# Altium PCB PCB1.PcbDoc
Units mil, origin at the board's own origin, x right, y up, seen from the top; angles counter-clockwise.
Board outline 5885 x 3800 mil, 2 copper layers (Top Layer, Bottom Layer); 49 components, 25 nets, 163 pads, 0 vias.
Unrouted connection lines stored in the file: 74.
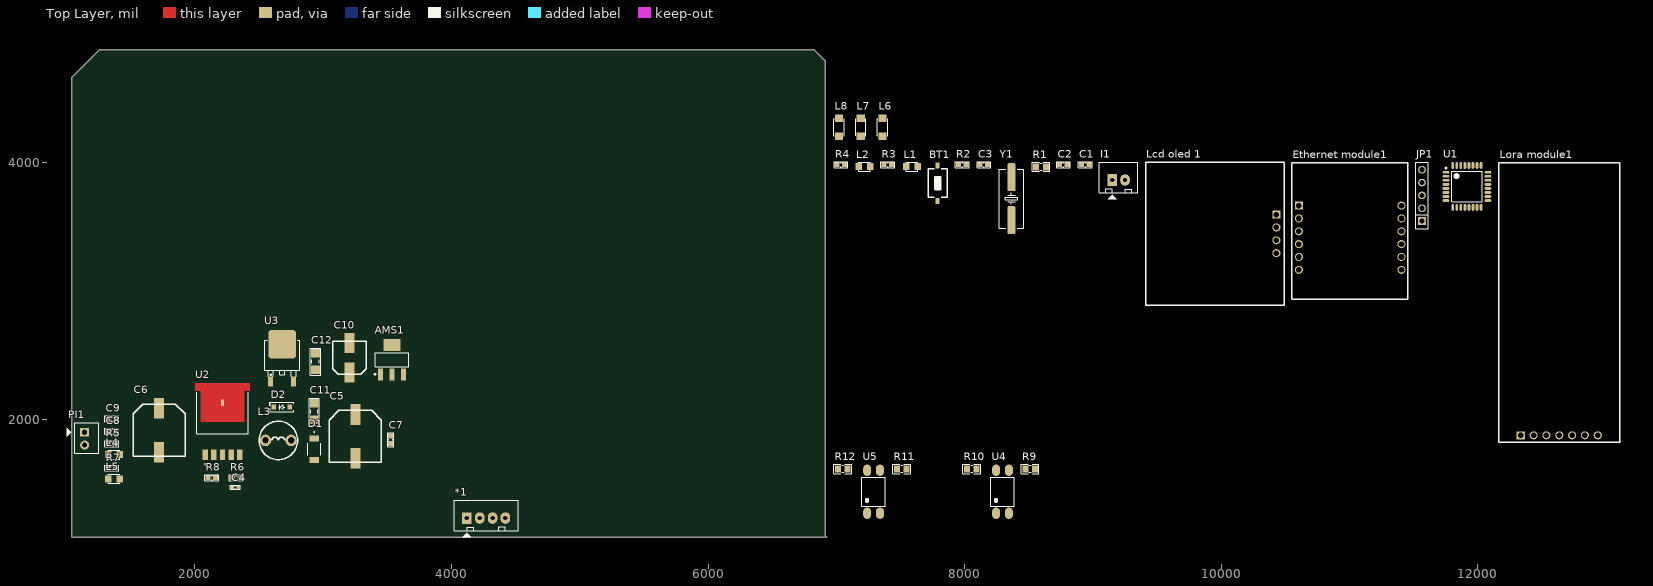
[diagram p0: Top Layer view]
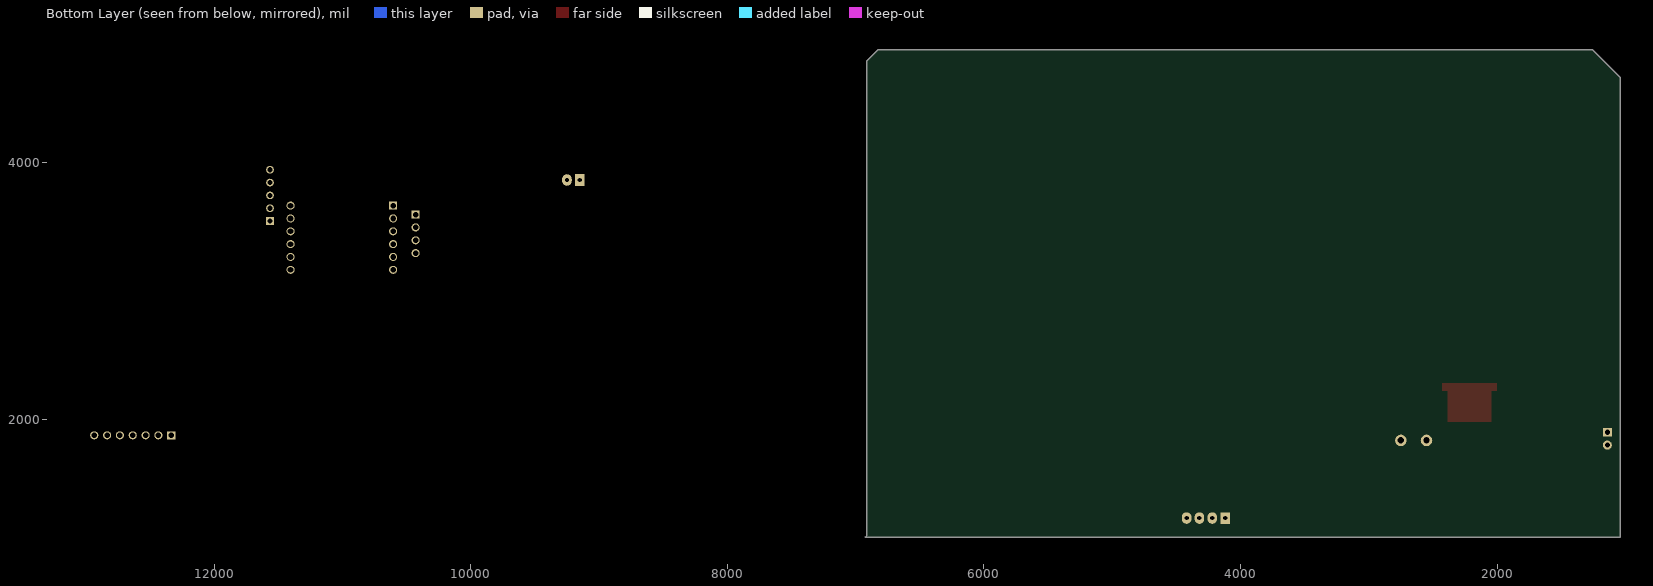
[diagram p1: Bottom Layer view, seen from below]

## Layer stack, top to bottom
Top Solder: solder mask 0.4, Solder Resist, Dk 3.5
Top Layer: signal copper 1.4
Dielectric 1: dielectric 12.6, FR-4, Dk 4.8
Bottom Layer: signal copper 1.4
Bottom Solder: solder mask 0.4, Solder Resist, Dk 3.5

## Board outline
1040,1080 1040,4665 1255,4880 6825,4880 6915,4790 6915,1090 6925,1080

## Design rules (kind name [scope] priority, off if disabled: settings)
Clearance [All] p1: gap=10 ignorepadtopadclearanceinfootprint=FALSE except(0: Arc-Hole Track-Hole SMDPad-Hole THPad-Hole Via-Hole Fill-Hole Poly-Hole Region-Hole Text-Hole)
PolygonConnect [All] p1: connectstyle=Relief reliefconductorwidth=10 reliefentries=4 polygonreliefangle="90 Angle" airgapwidth=10
RoomDefinition Power [InComponentClass('Power')] p1: confinementstyle=ConfineIn formatcopy=TRUE lockcomponents=FALSE outline 8715,0 14525,0 14525,2435 8715,2435
RoomDefinition OUTPUT [InComponentClass('OUTPUT')] p2: confinementstyle=ConfineIn formatcopy=TRUE lockcomponents=FALSE outline 6970,4165 7445,4165 7445,4490 6970,4490
RoomDefinition Main [InComponentClass('Main')] p3: confinementstyle=ConfineIn formatcopy=TRUE lockcomponents=FALSE outline 6970,1810 13125,1810 13125,4115 6970,4115
RoomDefinition Input [InComponentClass('Input')] p4: confinementstyle=ConfineIn formatcopy=TRUE lockcomponents=FALSE outline 6970,1140 8590,1140 8590,1760 6970,1760
RoutingVias [All] p1: holewidth=28 width=50 viastyle="Through Hole" minholewidth=28 minwidth=50 maxholewidth=28 maxwidth=50
SolderMaskExpansion [All] p1: expansion=4 istentingtop=FALSE
Width [All] p1: maxlimit=10 minlimit=10 preferedwidth=10
30 further rules are at their usual default settings.

## Classes and differential pairs
component class OUTPUT: L6 L7 L8
component class Input: *1 R9 R10 R11 R12 U4 U5
component class Main: BT1 C1 C2 C3 "Ethernet module1" I1 JP1 L1 L2 "Lcd oled 1" "Lora module1" R1 R2 R3 R4 U1 Y1
component class Power: AMS1 C4 C5 C6 C7 C8 C9 C10 C11 C12 D1 D2 L3 L4 L5 PI1 R5 R6 R7 R8 U2 U3

## Components (designator, comment, footprint, x,y, rotation, side; value= is the part's Value field where it differs from the comment)
*1 "INPUT" Header4 4120,1230 r0 top
AMS1 "AMS1117-3.3V" SOT223 3535.55,2464.17 r0 top value="AMS1117-3.3V SOT223"
BT1 "Nut Nhan 2 Chan SMD 3x6x2.5" "Nut Nhan 2 Chan SMD 3x6x2.5" 7790,3840 r90 top
C1 "22pF" "tu 0603"#1 8940,3985 r0 top
C2 "104" "tu 0603"#1 8770,3985 r0 top
C3 "22pF" "tu 0603"#1 8150,3985 r0 top
C4 "33nF" "tu 0402" 2313.35,1470 r180 top
C5 "330uF" "tu nhom 10 (g)" 3250,1866.26 r270 top
C6 "220uF" "tu nhom 10 (g)" 1720,1914.92 r270 top
C7 "105" "tu 0603"#2 3525,1840 r270 top
C8 "105" "tu 0603"#2 1351,1906.53 r0 top
C9 "105" "tu 0603"#2 1352,2003.66 r180 top
C10 "100uF" "tu nhom 6.3 (d)" 3205,2479.17 r90 top
C11 "104" "tu 1206" 2930,2059.96 r270 top
C12 "104" "tu 1206" 2940,2449.96 r90 top
D1 "SS54FSH" SODFL4725X110N 2930,1766.34 r270 top
D2 "S4" "DIODE SOD-123" 2677.99,2095 r180 top
"Ethernet module1" "Ethernet module" "Ethernet module - duplicate" 10605,3665 r0 top
I1 "I2C" CON2 9150,3865 r0 top
JP1 "USB" "JP 1x5 CT" 11565,3545 r90 top
L1 "LED 0805" LED-0805-Orange 7545,3970 r0 top
L2 "LED 0805" LED-0805-Orange 7175,3970 r0 top
L3 "470uH - 3A" "CUON CAM 100uH3A" 2650,1835 r0 top
L4 "LED 0805" LED-0805-Red 1415,1724.26 r180 top
L5 "LED 0805" LED-0805-Red 1325,1535 r0 top
L6 "LED 0805" LED-1206-Red 7360,4205 r90 top
L7 "LED 0805" LED-1206-Red 7190,4205 r90 top
L8 "LED 0805" LED-1206-Red 7020,4205 r90 top
"Lcd oled 1" "Lcd oled 1306 module" "LCD 1306 - duplicate" 10430,3595 r0 top
"Lora module1" "Lora module" LORA 12335,1875 r90 top
PI1 "Header 2P 2.54 Duc Thang" "Header DT 2P_2.54" 1140,1898.66 r0 top
R1 "1M" "tro smd 0805" 8595,3970 r0 top
R2 "10K" "tro smd 0603" 7980,3985 r0 top
R3 "1K" "tro smd 0603" 7400,3985 r0 top
R4 "1K" "tro smd 0603" 7035,3985 r0 top
R5 "10K" "tro smd 0603" 1351,1809.4 r0 top
R6 "13K" "tro smd 0603" 2320.47,1545 r0 top
R7 "10K" "tro smd 0603" 1351,1620 r0 top
R8 "1K5" "tro smd 0603" 2130.47,1545 r0 top
R9 "10k" "tro smd 0805" 8510,1615 r0 top
R10 "15k" "tro smd 0805" 8055,1615 r0 top
R11 "10k" "tro smd 0805" 7510,1615 r0 top
R12 "15k" "tro smd 0805" 7050,1615 r0 top
U1 "ATmega328-AU" TQFP32 11915,3815 r0 top
U2 "XL4015" CONV_XL4015 2215,2130 r90 top
U3 "78M05 SMD TO252" TO252 2680,2439.33 r0 top
U4 "OPTO PC817 SMD" SOP4 8295,1435 r90 top value=PC817
U5 "OPTO PC817 SMD" SOP4 7290,1435 r90 top value=PC817
Y1 "16Mhz" "Thach Anh 2 chan SMD" 8365,3720 r90 top value=4Mhz

## Footprints (in the part's own frame and the unit in brackets; to place one, negate y for a bottom-side part, rotate by r counter-clockwise, add the part's x,y. Pads: shape width x height; smd on the part's side, far side on the other; paste and mask are expansions set on the pad)
CON2 [mil] "CON2"
  rect 75x90 hole 34: 1(0,0)
  oval 75x90 hole 34: 2(100,0)
  silkscreen extent -100,-150 200,140, body extent -68,-70 168,107, height 236
CONV_XL4015 [mm]
  rect 2.16x1.07 smd: 1(-10.335,3.4) 2(-10.335,1.7) 3(-10.335,0) 4(-10.335,-1.7) 5(-10.335,-3.4)
  rect 1.27x0.635 smd paste-2 mask+0: 3.1(0,0)
  Top Layer region: 3.835,-5.4 2.365,-5.4 2.365,-4.35 -3.835,-4.35 -3.835,4.35 2.365,4.35 2.365,5.4 3.835,5.4
  silkscreen extent -12.3,-5.08 2.05,5.08
"CUON CAM 100uH3A" [mil] "100uH3A"
  round 90 hole 50: 1(-100,0) 2(100,0)
  silkscreen extent -150,-150 150,150, body extent -171,-175 171,167, height 394
"DIODE SOD-123" [mm] "SOD-123"
  rect 0.9x0.95 smd: 1(-1.575,0) 2(1.575,0)
  silkscreen extent -2.3,-0.92 2.41,0.92, body extent -1.86,-0.78 1.86,0.77, height 1.35
"Ethernet module - duplicate" [mm]
  rect 1.6x1.6 hole 1.1: 1(0,0)
  round 1.6 hole 1.1: 2(0,-2.54) 3(0,-5.08) 4(0,-7.62) 5(0,-10.16) 6(0,-12.7) 7(20.32,-12.7) 8(20.32,-10.16) 9(20.32,-7.62) 10(20.32,-5.08) 11(20.32,-2.54) 12(20.32,0)
  silkscreen extent -1.4,-18.54 21.59,8.51, body extent -1.34,-18.54 21.66,8.56, height 17.94
Header4 [mil] "CON4"
  rect 75x90 hole 34: 1(0,0)
  oval 75x90 hole 34: 2(100,0) 3(200,0) 4(300,0)
  silkscreen extent -100,-150 400,140, body extent -90,-90 398,136, height 276
"Header DT 2P_2.54" [mil]
  rect 70x70 hole 39.37 unplated: 1(0,0)
  round 70 hole 39.37 unplated: 2(0,-100)
  silkscreen extent -140,-165 110,75, body extent -70,-160 107,72, height 237
"JP 1x5 CT" [mm]
  rect 1.52x1.52 hole 1.02: 1(0,0)
  round 1.52 hole 1.02: 2(2.54,0) 3(5.08,0) 4(7.62,0) 5(10.16,0)
  silkscreen extent -1.52,-1.27 11.68,1.27, body extent -1.52,-1.25 11.68,1.25, height 8.51
"LCD 1306 - duplicate" [mm]
  rect 1.6x1.6 hole 1.1: 1(0,0)
  round 1.6 hole 1.1: 2(0,-2.54) 3(0,-5.08) 4(0,-7.62)
  silkscreen extent -25.91,-18.03 1.52,10.41, body extent -25.89,-18.01 1.51,10.39, height 5.79
LED-0805-Orange [mil]
  rect 50x55 smd: 1(0,0) 2(90,0)
  silkscreen extent 0,-35 90,35, body extent 5,-25 85,25, height 43
LED-0805-Red [mil]
  rect 50x55 smd: 1(0,0) 2(90,0)
  silkscreen extent 0,-35 90,35, body extent 5,-25 85,25, height 43
LED-1206-Red [mil]
  rect 60x65 smd: 1(0,0) 2(142,0)
  silkscreen extent 6,-40 136,40, body extent 7,-31 133,32, height 43
LORA [mm]
  rect 1.6x1.6 hole 1.1: 1(0,0)
  round 1.6 hole 1.1: 2(0,-2.54) 3(0,-5.08) 4(0,-7.62) 5(0,-10.16) 6(0,-12.7) 7(0,-15.24)
  silkscreen extent -1.4,-19.68 53.97,4.32, body extent -1.4,-19.75 54.1,4.25, height 5.61
"Nut Nhan 2 Chan SMD 3x6x2.5" [mm] "Switch SMD type"
  rect 1.2x0.8 smd: 1(-3.5,0) 2(3.5,0)
  silkscreen extent -2.82,-1.85 2.82,1.85, body extent -3.05,-1.85 3.05,1.85, height 2.5
SODFL4725X110N [mm]
  rect 1.17x1.92 smd: A(2.125,0) C(-2.125,0)
  silkscreen extent -3.5,-1.25 1.22,1.25, body extent -2.35,-1.25 2.35,1.25, height 1.1
SOP4 [mm]
  oval 2.25x1.6 smd: 1(-4.25,1.27) 2(-4.25,-1.27) 3(4.25,-1.27) 4(4.25,1.27)
  silkscreen extent -2.85,-2.3 2.85,2.3, body extent -4.67,-2.29 4.93,2.31, height 3.6
SOT223 [mm]
  rect 1x2.4 smd: 1(-2.3,-2.9) 2(0,-2.9) 3(2.3,-2.9)
  rect 3.3x2.4 smd: 4(0,2.9)
  silkscreen extent -3.47,-3.02 3.35,1.4, body extent -3.25,-3.56 3.25,3.4, height 1.68
"Thach Anh 2 chan SMD" [mm] "SMD Crystal HC49/US-SM package"
  round 0.508 on Mech15: 0(0,0)
  rrect25% 5.5x1.5 smd: 1(-4.25,0) 2(4.25,0)
  silkscreen extent -5.84,-2.41 5.84,2.41, body extent -6.4,-2.41 6.4,2.42, height 4.29
TO252 [mm] "TO252"
  round 0.5 on Mech15: 0(0,0)
  rrect25% 1x2 smd: 1(-2.285,-3.7) 3(2.285,-3.7)
  rrect25% 5.5x5.7 smd: 2(0,3.7)
  silkscreen extent -3.5,-2.7 3.5,4.5, body extent -3.3,-3.95 3.3,5.76, height 2.31
TQFP32 [mm] "Thin QFP, 32-Leads, Body 9x9mm, Pitch 0.8mm, IPC Low Density"
  oval 1.35x0.55 smd: 1(-4.15,2.8) 2(-4.15,2) 3(-4.15,1.2) 4(-4.15,0.4) 5(-4.15,-0.4) 6(-4.15,-1.2) 7(-4.15,-2) 8(-4.15,-2.8) 17(4.15,-2.8) 18(4.15,-2) 19(4.15,-1.2) 20(4.15,-0.4) 21(4.15,0.4) 22(4.15,1.2) 23(4.15,2) 24(4.15,2.8)
  oval 0.55x1.35 smd: 9(-2.8,-4.15) 10(-2,-4.15) 11(-1.2,-4.15) 12(-0.4,-4.15) 13(0.4,-4.15) 14(1.2,-4.15) 15(2,-4.15) 16(2.8,-4.15) 25(2.8,4.15) 26(2,4.15) 27(1.2,4.15) 28(0.4,4.15) 29(-0.4,4.15) 30(-1.2,4.15) 31(-2,4.15) 32(-2.8,4.15)
  silkscreen extent -4.27,-3.05 3.05,3.75, body extent -4.5,-4.5 4.5,4.5, height 1.4
"tro smd 0603" [mm] "Chip Capacitor, 2-Leads, Body 1,60x0,80mm, IPC Medium Density"
  rect 1x0.95 smd mask+0.076: 1(-0.75,0) 2(0.75,0)
  silkscreen extent -1.35,-0.58 1.37,0.58, body extent -0.82,-0.42 0.82,0.43, height 0.44
"tro smd 0805" [mm]
  rect 1.2x1.4 smd: 1(-0.946,-0.061) 2(0.954,-0.061)
  silkscreen extent -1.75,-0.97 1.75,0.84, body extent -1.56,-0.76 1.44,0.64, height 0.53
"tu 0402" [mm]
  rect 0.65x0.6 smd: 1(-0.55,0) 2(0.55,0)
  silkscreen extent -0.97,-0.38 0.97,0.41, body extent -0.5,-0.27 0.5,0.26, height 0.35
"tu 0603"#1 [mm] "Chip Capacitor, 2-Leads, Body 1,60x0,80mm, IPC Medium Density"
  rect 1x0.95 smd mask+0.076: 1(-0.75,0) 2(0.75,0)
  silkscreen extent -1.35,-0.58 1.37,0.58, body extent -0.8,-0.4 0.8,0.4, height 0.9
"tu 0603"#2 [mm] "Chip Capacitor, 2-Leads, Body 1,60x0,80mm, IPC Medium Density"
  rect 1x0.95 smd: 1(-0.75,0) 2(0.75,0)
  silkscreen extent -1.35,-0.58 1.37,0.58, body extent -0.8,-0.4 0.8,0.4, height 0.9
"tu 1206" [mm]
  rect 1.7x1.7 smd: 1(-1.65,0) 2(1.65,0)
  silkscreen extent -2.67,-1.02 2.67,1.02, body extent -1.57,-0.8 1.63,0.8, height 0.94
"tu nhom 6.3 (d)" [mm]
  rect 4x2 smd: 1(-2.9,0) 2(2.9,0)
  silkscreen extent -3.3,-3.3 3.3,3.3, body extent -3.8,-3.3 3.8,3.3, height 8
"tu nhom 10 (g)" [mm]
  rect 4.1x2 smd: 1(-4.35,0) 2(4.35,0)
  silkscreen extent -5.15,-5.15 5.15,5.15, body extent -5.9,-5.25 5.9,5.25, height 10.5

## Part data
AMS1: library part "AMS1117 SMD", "Dán", Chung_Loai=Dán, Don_Vi=Con, Ma_Hang=MH000596
C1 C3: library part "Tu 0603 22pF 50V 10%", "Dán", Chung_Loai=Dán, Don_Vi=Con, Ma_Hang=MH004570, So_Chan=2, Ten_Linh_Kien="Tụ 0603 22pF 50V 10%"
C2: library part "Tu 0603 104 50V 10%", "Dán", Chung_Loai=Dán, Don_Vi=Con, Ma_Hang=MH004568, So_Chan=2, Ten_Linh_Kien="Tụ 0603 104-100nF 10% 50V"
C4: library part "Tu 0402 33nF 10V", "Dán", Chung_Loai=Dán, Don_Vi=Con, Ma_Hang=MH007853, So_Chan=2, Ten_Linh_Kien="Tụ 0402 33nF X7R 10V GRM155R71A333KA01D"
C5: library part "Tu Nhom 330uF 50V", "Dán", Chung_Loai=Dán, Don_Vi=Con, Ma_Hang=MH002225, So_Chan=2, Ten_Linh_Kien="Tụ Nhôm 330uF 50V 10x10.2MM"
C6: library part "Tu Nhom 220uF 50V", "Dán", Chung_Loai=Dán, Don_Vi=Con, Ma_Hang=MH002228, So_Chan=2, Ten_Linh_Kien="Tụ Nhôm 220uF 50V 10x10.2MM"
C7: library part "Tu 0603 105 16V 20%", "Dán", Chung_Loai=Dán, Don_Vi=Con, Ma_Hang=MH004574, So_Chan=2, Ten_Linh_Kien="Tụ 0603 105-1uF 20% 16V"
C8 C9: library part "Tu 0603 105 50V 10%", "Dán", Chung_Loai=Dán, Don_Vi=Con, Ma_Hang=MH004569, So_Chan=2, Ten_Linh_Kien="Tụ 0603 105-1uF 50V 10%"
C10: library part "Tu Nhom 100uF 25V", "Dán", Chung_Loai=Dán, Don_Vi=Con, Ma_Hang=MH002222, So_Chan=2, Ten_Linh_Kien="Tụ Nhôm 100uF 25V 6x7MM"
C11 C12: library part "Tu 1206 104 50V 20%", "Dán", Chung_Loai=Dán, Don_Vi=Con, Ma_Hang=MH004544, So_Chan=2, Ten_Linh_Kien="Tụ 1206 104-0.1uF 20% 50V"
D1: "5A, 40V, Schottky Rectifier", Package="SOD-128-2 Taiwan Semiconductor", Availability="In Stock", Check_prices=https://www.snapeda.com/parts/SS54FSH/Taiwan+Semiconductor/view-part/?ref=eda, MF="Taiwan Semiconductor", MP=SS54FSH, Price=None, SnapEDA_Link=https://www.snapeda.com/parts/SS54FSH/Taiwan+Semiconductor/view-part/?ref=snap
D2: library part "Diode S4", "Dán", Chung_Loai=Dán, Don_Vi=Con, Ma_Hang=MH005519, Ten_Linh_Kien="Diode S4 SOD123 ( 1N5819 SOD123)"
JP1: library part "JP 1x5 2.54 Cai Thang", "Cắm", Chung_Loai=Cắm, Don_Vi=Con, Ma_Hang=MH004006, Ten_Linh_Kien="Jump Đơn Cái 2.54MM 1x20P Thẳng"
L1 L2: library part "LED 0805 Cam", "Dán", Chung_Loai=Dán, Don_Vi=Con, Ma_Hang=MH002328, Ten_Linh_Kien="LED 0805 Màu Cam ( Orange)"
L3: library part "CUON CAM 470uH DIP", "Cắm", Chung_Loai=Cắm, Don_Vi=Con, Ma_Hang=MH002232, Ten_Linh_Kien="Cuộn Cảm 470uH 3A 8x10MM"
L4 L5: library part "LED 0805 Do", "Dán", Chung_Loai=Dán, Don_Vi=Con, Ma_Hang=MH000897, Ten_Linh_Kien="LED 0805 Màu Đỏ (Red)"
L6 L7 L8: library part "LED 1206 Do", "Dán", Chung_Loai=Dán, Don_Vi=Con, Ma_Hang=MH002334, Ten_Linh_Kien="LED1206 Màu Đỏ (Red)"
PI1: "Cắm", Chung_Loai=Cắm, Don_Vi=Con, Ma_Hang=MH001283, Ten_Linh_Kien="Header 2P XH2.54-2P Đực Thẳng"
R1: library part "Tro 0805 5% 1M", "Dán", Chung_Loai=Dán, Don_Vi=Con, Ma_Hang=MH005235, So_Chan=2, Ten_Linh_Kien="Trở 0805 5% 1M"
R2 R3 R4: library part "Tro 0603 5% 220R", "Dán", Chung_Loai=Dán, Don_Vi=Con, Ma_Hang=MH006322, So_Chan=2, Ten_Linh_Kien="Trở 0603 5% 220R"
R5 R7: library part "Tro 0603 5% 39R", "Dán", Chung_Loai=Dán, Don_Vi=Con, Ma_Hang=MH008714, So_Chan=2, Ten_Linh_Kien="Trở 0603 5% 39R"
R6 R8: library part "Tro 0603 5% 15k", "Dán", Chung_Loai=Dán, Don_Vi=Con, Ma_Hang=MH004575, So_Chan=2, Ten_Linh_Kien="Trở 0603 5% 15k"
R9 R10 R11 R12: library part "Tro 0805 1% 15k", "Dán", Chung_Loai=Dán, Don_Vi=Con, Ma_Hang=MH005476, So_Chan=2, Ten_Linh_Kien="Trở 0805 1% 15k"
U1: "8-bit AVR Microcontroller, 32KB Flash, 1KB EEPROM, 2KB SRAM, 32-pin TQFP, Industrial Grade (-40°C to 85°C)", Supplier Part Number 1=ATMEGA328-AU-ND, Code_JEDEC=MS-026-ABA, ComponentLink1Description="Manufacturer Link", ComponentLink1URL=http://www.atmel.com/products/avr/default.asp?, ComponentLink2Description="ATmega48A/48PA/88A/88PA/168A/168PA/328/328P Datasheet", ComponentLink2URL=http://www.atmel.com/dyn/resources/prod_documents/8271.pdf, ComponentLink3Description="ATmega48A/48PA/88A/88PA/168A/168PA/328/328P Summary", ComponentLink3URL=http://www.atmel.com/dyn/resources/prod_documents/8271S.pdf, ComponentLink4Description="Atmel.com Home", ComponentLink4URL=http://www.atmel.com, DatasheetVersion="revA, Jan-2010", PackageDescription="32-Lead, 7x7x1.0 mm Body, 0.8mm Lead Pitch, Thin Profile Plastic Quad Flat Package (TQFP)", PackageReference=32A, PackageVersion="revB, Oct-2001", Published=1-Apr-2010, Publisher="Altium Limited", Supplier 1=Digi-Key, Supplier 2=Mouser, Supplier Part Number 2=556-ATMEGA328-AU
U2: "5A 180KHz 36V Buck DC to DC Converter", Package=None, Availability=Unavailable, MP=XL4015, Price=None
U3: "Dán", Chung_Loai=Dán, Don_Vi=Con, Ma_Hang=MH001917, Ten_Linh_Kien="78M05 TO252"
U4 U5: "Single Opto"
Y1: library part "Thach Anh 2 chan SMD", "Crystal For all Crystal 2pin."
BT1: Ma_Hang=MH001036, Ten="Nút Nhấn 2 Chân 3x6x2.5MM SMD"

## Nets (pads, with @x,y where several pads share a name; then routed paths per layer and width w, separated by ;. In a path a pad name is that pad's centre, name@x,y a point inside that pad or via, vN(x,y) a via of type N, cw(c..) or ccw(c..) an arc to the next point about the centre after c; other vN are vias at no path point)
3V3: AMS1.2 AMS1.4
5v: AMS1.3 C10.1 C12.1 R2.2 R3.1 R4.1 R9.2 R11.2 U1.4 U1.18 U3.3
12v: C4.1 C5.1 C7.1 D2.1 L3.2 R6.2 R7.2
24V: C6.1 C8.2 C9.2 PI1.2 R5.2 U2.5
AP0: *1.4
DP4: R9.1 U4.4
DP5: R11.1 U5.4
GND: *1.1 AMS1.1 BT1.2 C1.2 C2.2 C3.2 C5.2 C6.2 C7.2 C8.1 C10.2 C11.2 C12.2 D1.A L1.2 L4.2 L5.2 L6.2 L7.2 L8.2 PI1.1 R8.1 U1.21 U2.1 U3.2 U4.3 U5.3
Input1: *1.2 R10.1
Input2: *1.3 R12.1
NetC1_1: C1.1 U1.7 Y1.1
NetC2_1: C2.1 U1.20
NetC3_1: C3.1 R1.2 U1.8 Y1.2
NetC4_2: C4.2 R6.1 R8.2 U2.2
NetC9_1: C9.1 U2.4
NetC11_1: C11.1 D2.2 U3.1
NetD1_C: D1.C L3.1 U2.3
NetL1_1: L1.1 R3.2
NetL2_1: L2.1 R4.2
NetL4_1: L4.1 R5.1
NetL5_1: L5.1 R7.1
NetR10_2: R10.2 U4.1
NetR12_2: R12.2 U5.1
RESET: BT1.1 R2.1
VSS: U4.2 U5.2
pads on no net: "Ethernet module1.1" "Ethernet module1.2" "Ethernet module1.3" "Ethernet module1.4" "Ethernet module1.5" "Ethernet module1.6" "Ethernet module1.7" "Ethernet module1.8" "Ethernet module1.9" "Ethernet module1.10" "Ethernet module1.11" "Ethernet module1.12" "Lcd oled 1.1" "Lcd oled 1.2" "Lcd oled 1.3" "Lcd oled 1.4" "Lora module1.1" "Lora module1.2" "Lora module1.3" "Lora module1.4" "Lora module1.5" "Lora module1.6" "Lora module1.7" I1.1 I1.2 JP1.1 JP1.2 JP1.3 JP1.4 JP1.5 L2.2 L6.1 L7.1 L8.1 R1.1 U1.1 U1.2 U1.3 U1.5 U1.6 U1.9 U1.10 U1.11 U1.12 U1.13 U1.14 U1.15 U1.16 U1.17 U1.19 U1.22 U1.23 U1.24 U1.25 U1.26 U1.27 U1.28 U1.29 U1.30 U1.31 U1.32 U2.3.1 U3.0 Y1.0